# Altium PCB STM32f103c8_minsystem V2_1.PcbDoc
Units mm, origin at the board's own origin, x right, y up, seen from the top; angles counter-clockwise.
Board outline 18 x 35 mm, 2 copper layers (Top Layer, Bottom Layer); 27 components, 47 nets, 152 pads, 125 vias.
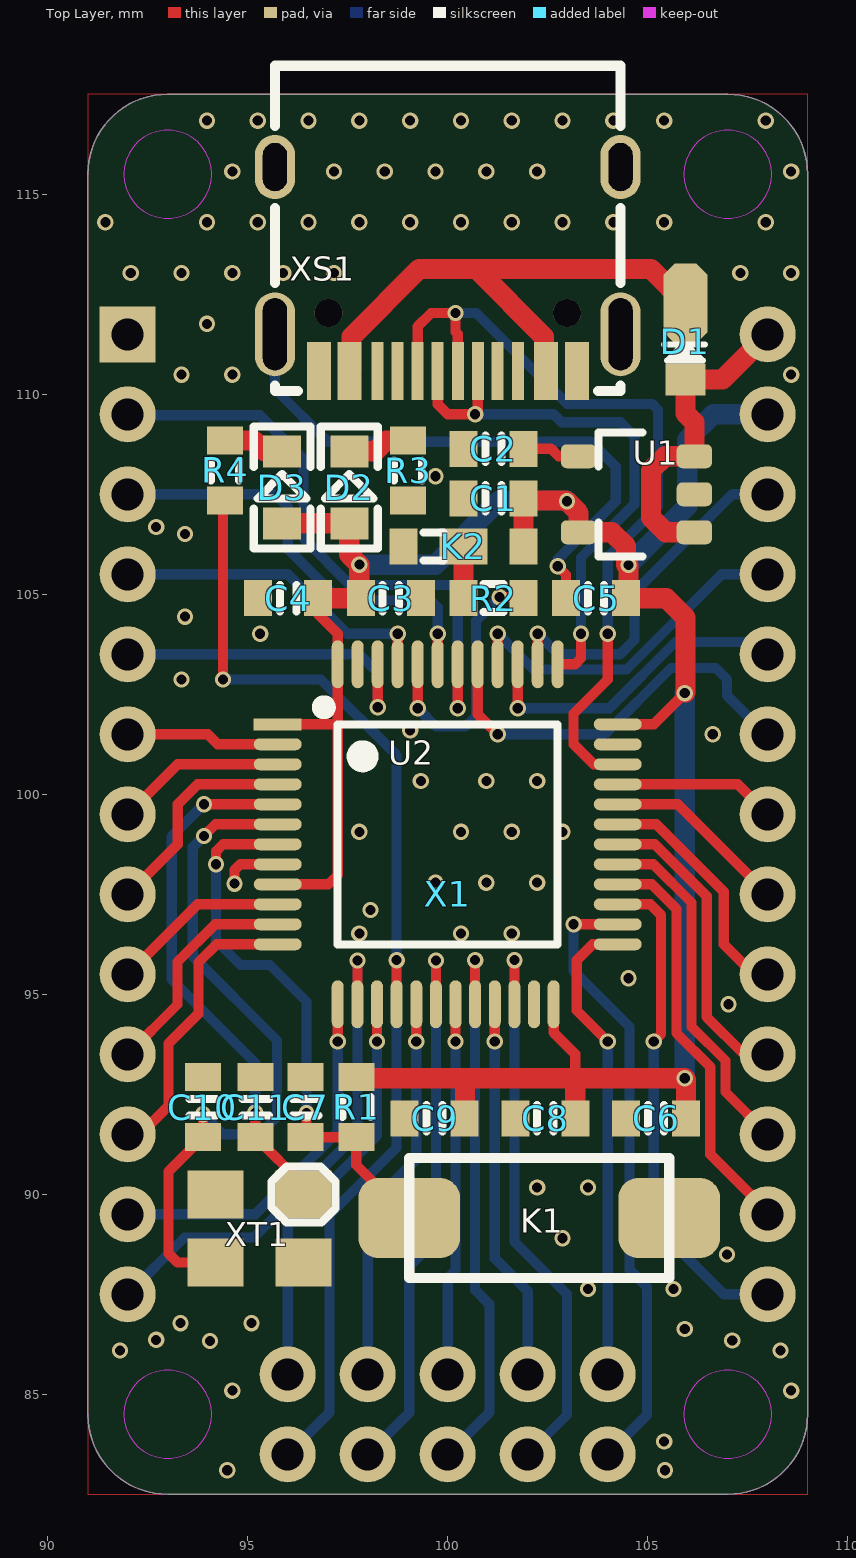
[diagram p0: Top Layer view]
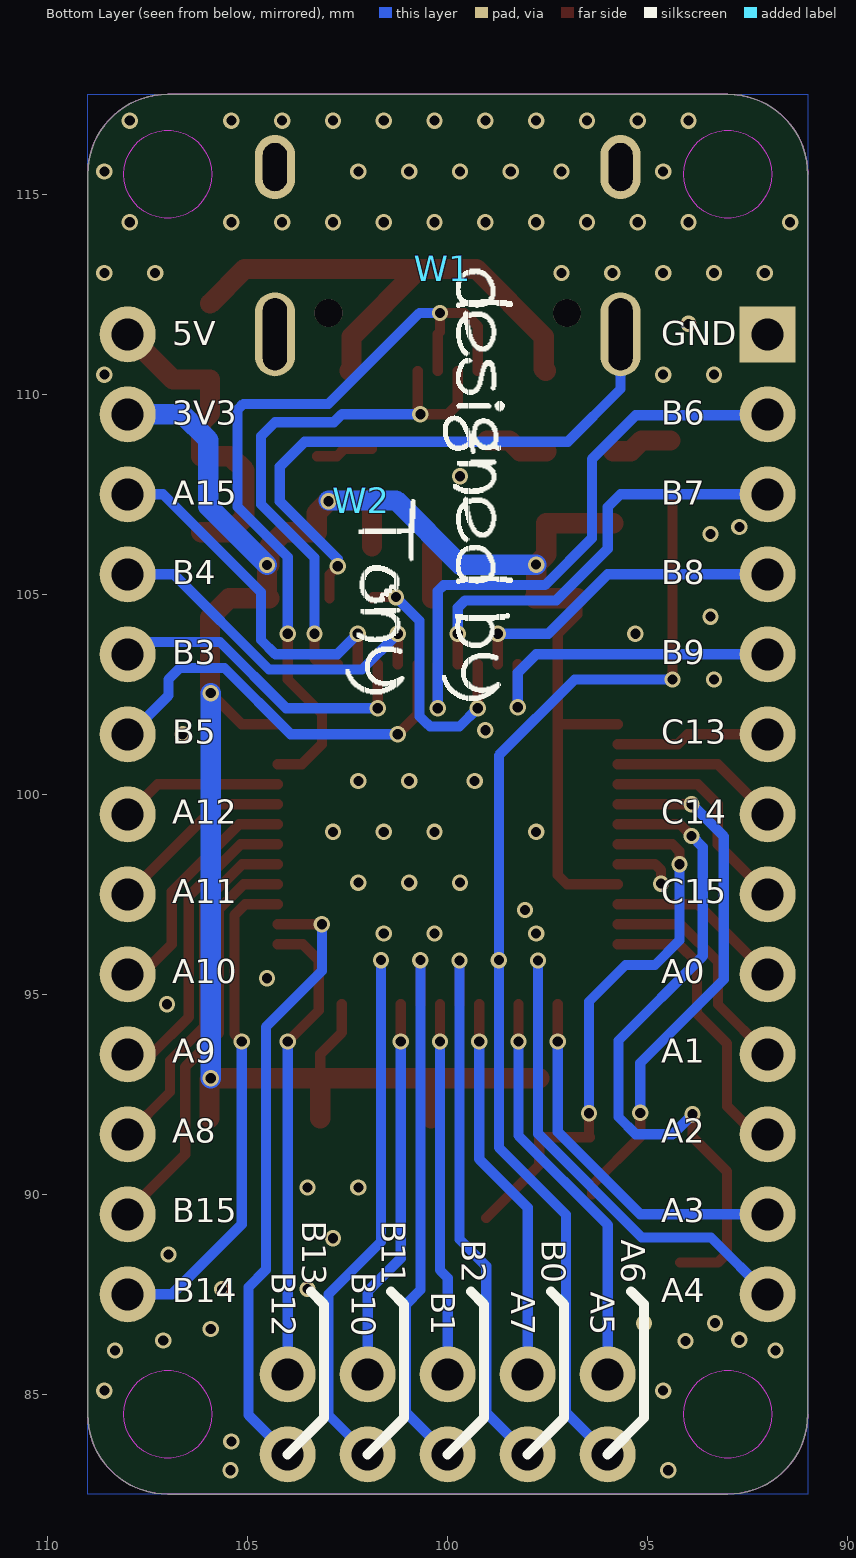
[diagram p1: Bottom Layer view, seen from below]

## Layer stack, top to bottom
Top Solder: solder mask 0.0102, Solder Resist, Dk 3.5
Top Layer: signal copper 0.0356
Dielectric 1: dielectric 0.32, FR-4, Dk 4.8
Bottom Layer: signal copper 0.0356
Bottom Solder: solder mask 0.0102, Solder Resist, Dk 3.5

## Board outline
91,84.5 91,115.5 cw(c93,115.5) 93,117.5 107,117.5 cw(c107,115.5) 109,115.5 109,84.5 cw(c107,84.5) 107,82.5 93,82.5 cw(c93,84.5)

## Design rules (kind name [scope] priority, off if disabled: settings)
AssemblyTestPointUsage [All] p0: scope1count=1 scope1_0_kind=Board scope1_0_value=Board scope2count=1 scope2_0_kind=Board scope2_0_value=Board commentlength=0
AssemblyTestpoint [All] p0: scope1count=1 scope1_0_kind=Board scope1_0_value=Board scope2count=1 scope2_0_kind=Board scope2_0_value=Board commentlength=0
Clearance [All] p0: scope1count=1 scope1_0_kind=Board scope1_0_value=Board scope2count=1 scope2_0_kind=Board scope2_0_value=Board commentlength=0 gap=0.127
Clearance [All] p1: gap=0.127 ignorepadtopadclearanceinfootprint=TRUE
ComponentClearance [All] p0 off: scope1count=1 scope1_0_kind=Board scope1_0_value=Board scope2count=1 scope2_0_kind=Board scope2_0_value=Board commentlength=0 gap=0 collisioncheckmode=3
ComponentClearance [All] p1 off: gap=0 collisioncheckmode=3 verticalgap=0.254 showdistances=FALSE
DiffPairsRouting [All] p0: scope1count=1 scope1_0_kind=Board scope1_0_value=Board scope2count=1 scope2_0_kind=Board scope2_0_value=Board commentlength=0
FabricationTestPointUsage [All] p0: scope1count=1 scope1_0_kind=Board scope1_0_value=Board scope2count=1 scope2_0_kind=Board scope2_0_value=Board commentlength=0 valid=0 allowmultiple=FALSE
FabricationTestpoint [All] p0: scope1count=1 scope1_0_kind=Board scope1_0_value=Board scope2count=1 scope2_0_kind=Board scope2_0_value=Board commentlength=0 side=3 testpointundercomponent=TRUE minsize=1.016 maxsize=2.54 preferedsize=1.524 minholesize=0 maxholesize=1.016 preferedholesize=0.813 testpointgrid=0.025
FanoutControl Fanout_BGA [All] p0 off: scope1count=1 scope1_0_kind=Board scope1_0_value=Board scope2count=1 scope2_0_kind=Board scope2_0_value=Board commentlength=69 // Protel DXP Scope 1 Expression Was: IsBGA   Fanout_BGA (Default Rule)
FanoutControl Fanout_LCC [All] p0 off: scope1count=1 scope1_0_kind=Board scope1_0_value=Board scope2count=1 scope2_0_kind=Board scope2_0_value=Board commentlength=69 // Protel DXP Scope 1 Expression Was: IsLCC   Fanout_LCC (Default Rule)
FanoutControl Fanout_SOIC [All] p0 off: scope1count=1 scope1_0_kind=Board scope1_0_value=Board scope2count=1 scope2_0_kind=Board scope2_0_value=Board commentlength=71 // Protel DXP Scope 1 Expression Was: IsSOIC   Fanout_SOIC (Default Rule)
FanoutControl Fanout_Small [All] p0 off: scope1count=1 scope1_0_kind=Board scope1_0_value=Board scope2count=1 scope2_0_kind=Board scope2_0_value=Board commentlength=84 // Protel DXP Scope 1 Expression Was: (CompPinCount < 5)   Fanout_Small (Default Rule)
FanoutControl Fanout_Default [All] p0: scope1count=1 scope1_0_kind=Board scope1_0_value=Board scope2count=1 scope2_0_kind=Board scope2_0_value=Board commentlength=30 // Fanout_Default (Default Rule)
Height [All] p0: scope1count=1 scope1_0_kind=Board scope1_0_value=Board scope2count=1 scope2_0_kind=Board scope2_0_value=Board commentlength=0
HoleSize [All] p0: scope1count=1 scope1_0_kind=Board scope1_0_value=Board scope2count=1 scope2_0_kind=Board scope2_0_value=Board commentlength=0 absolutevalues=TRUE maxlimit=2.54 minlimit=0.025 maxpercent=80.000 minpercent=20.000
HoleToHoleClearance [All] p0: scope1count=1 scope1_0_kind=Board scope1_0_value=Board scope2count=1 scope2_0_kind=Board scope2_0_value=Board commentlength=0
LayerPairs [All] p0: scope1count=1 scope1_0_kind=Board scope1_0_value=Board scope2count=1 scope2_0_kind=Board scope2_0_value=Board commentlength=0 enforce=TRUE
MinimumSolderMaskSliver [All] p0: scope1count=1 scope1_0_kind=Board scope1_0_value=Board scope2count=1 scope2_0_kind=Board scope2_0_value=Board commentlength=0
NetAntennae [All] p0: scope1count=1 scope1_0_kind=Board scope1_0_value=Board scope2count=1 scope2_0_kind=Board scope2_0_value=Board commentlength=0
PasteMaskExpansion [All] p0: scope1count=1 scope1_0_kind=Board scope1_0_value=Board scope2count=1 scope2_0_kind=Board scope2_0_value=Board commentlength=0 expansion=0
PlaneClearance [All] p0: scope1count=1 scope1_0_kind=Board scope1_0_value=Board scope2count=1 scope2_0_kind=Board scope2_0_value=Board commentlength=0 clearance=0.508
PlaneConnect [All] p0: scope1count=1 scope1_0_kind=Board scope1_0_value=Board scope2count=1 scope2_0_kind=Board scope2_0_value=Board commentlength=0 planeconnectstyle=Direct reliefexpansion=0.508 reliefentries=4 reliefconductorwidth=0.254 reliefairgap=0.254
PlaneConnect [All] p1: planeconnectstyle=Direct reliefexpansion=0.508 reliefentries=4 reliefconductorwidth=0.254 reliefairgap=0.254
PolygonConnect PolygonConnect_3 [All] p0 off: scope1count=1 scope1_0_kind=Board scope1_0_value=Board scope2count=1 scope2_0_kind=Board scope2_0_value=Board commentlength=69 connectstyle=Direct reliefconductorwidth=0.254 reliefentries=4 polygonreliefangle="90 Angle" // Protel DXP Scope 2 Expression Was: IsNamedPolygon('GND_L01_P001')
PolygonConnect PolygonConnect_2 [All] p0 off: scope1count=1 scope1_0_kind=Board scope1_0_value=Board scope2count=1 scope2_0_kind=Board scope2_0_value=Board commentlength=69 connectstyle=Direct reliefconductorwidth=0.254 reliefentries=4 polygonreliefangle="90 Angle" // Protel DXP Scope 2 Expression Was: IsNamedPolygon('GND_L02_P000')
PolygonConnect [All] p0 off: scope1count=1 scope1_0_kind=Board scope1_0_value=Board scope2count=1 scope2_0_kind=Board scope2_0_value=Board commentlength=73 connectstyle=Direct reliefconductorwidth=0.508 reliefentries=4 polygonreliefangle="90 Angle" // Protel DXP Scope 2 Expression Was: IsNamedPolygon('Bottom Layer-GND')
PolygonConnect PolygonConnect_1 [All] p0 off: scope1count=1 scope1_0_kind=Board scope1_0_value=Board scope2count=1 scope2_0_kind=Board scope2_0_value=Board commentlength=70 connectstyle=Direct reliefconductorwidth=0.508 reliefentries=4 polygonreliefangle="90 Angle" // Protel DXP Scope 2 Expression Was: IsNamedPolygon('Top Layer-GND')
PolygonConnect PolygonConnect_3 [All vs IsNamedPolygon('GND_L01_P001')] p1: connectstyle=Direct reliefconductorwidth=0.254 reliefentries=4 polygonreliefangle="90 Angle" airgapwidth=0.254
PolygonConnect PolygonConnect_2 [All vs IsNamedPolygon('GND_L02_P000')] p2: connectstyle=Direct reliefconductorwidth=0.254 reliefentries=4 polygonreliefangle="90 Angle" airgapwidth=0.254
PolygonConnect [All vs IsNamedPolygon('Bottom Layer-GND')] p3: connectstyle=Direct reliefconductorwidth=0.508 reliefentries=4 polygonreliefangle="90 Angle" airgapwidth=0.254
PolygonConnect PolygonConnect_1 [All vs IsNamedPolygon('Top Layer-GND')] p4: connectstyle=Direct reliefconductorwidth=0.508 reliefentries=4 polygonreliefangle="90 Angle" airgapwidth=0.254
RoutingCorners [All] p0: scope1count=1 scope1_0_kind=Board scope1_0_value=Board scope2count=1 scope2_0_kind=Board scope2_0_value=Board commentlength=0 cornerstyle=45-Degree minsetback=2.54 maxsetback=2.54
RoutingLayers [All] p0: scope1count=1 scope1_0_kind=Board scope1_0_value=Board scope2count=1 scope2_0_kind=Board scope2_0_value=Board commentlength=0 top layer=Automatic bottom layer=Automatic
RoutingPriority [All] p0: scope1count=1 scope1_0_kind=Board scope1_0_value=Board scope2count=1 scope2_0_kind=Board scope2_0_value=Board commentlength=0
RoutingTopology [All] p0: scope1count=1 scope1_0_kind=Board scope1_0_value=Board scope2count=1 scope2_0_kind=Board scope2_0_value=Board commentlength=0 topology=Shortest
RoutingVias [All] p0: scope1count=1 scope1_0_kind=Board scope1_0_value=Board scope2count=1 scope2_0_kind=Board scope2_0_value=Board commentlength=0 holewidth=0.254 width=0.406 viastyle="Through Hole" minholewidth=0.254 minwidth=0.406 maxholewidth=0.711 maxwidth=1.27
RoutingVias [All] p1: holewidth=0.254 width=0.406 viastyle="Through Hole" minholewidth=0.254 minwidth=0.406 maxholewidth=0.711 maxwidth=1.27
ShortCircuit [All] p0: scope1count=1 scope1_0_kind=Board scope1_0_value=Board scope2count=1 scope2_0_kind=Board scope2_0_value=Board commentlength=0 allowed=FALSE
SilkToBoardRegionClearance [All] p0: scope1count=1 scope1_0_kind=Board scope1_0_value=Board scope2count=1 scope2_0_kind=Board scope2_0_value=Board commentlength=0
SilkToSilkClearance [All] p0: scope1count=1 scope1_0_kind=Board scope1_0_value=Board scope2count=1 scope2_0_kind=Board scope2_0_value=Board commentlength=0
SilkToSolderMaskClearance [All] p0 off: scope1count=1 scope1_0_kind=Board scope1_0_value=Board scope2count=1 scope2_0_kind=Board scope2_0_value=Board commentlength=44 // Protel DXP Scope 1 Expression Was: IsPad
SolderMaskExpansion [All] p0: scope1count=1 scope1_0_kind=Board scope1_0_value=Board scope2count=1 scope2_0_kind=Board scope2_0_value=Board commentlength=0 expansion=0.102
SolderMaskExpansion [All] p1: expansion=0.102 istentingtop=FALSE
UnRoutedNet [All] p0: scope1count=1 scope1_0_kind=Board scope1_0_value=Board scope2count=1 scope2_0_kind=Board scope2_0_value=Board commentlength=0
UnpouredPolygon [All] p0: scope1count=1 scope1_0_kind=Board scope1_0_value=Board scope2count=1 scope2_0_kind=Board scope2_0_value=Board commentlength=0
Width [All] p0: scope1count=1 scope1_0_kind=Board scope1_0_value=Board scope2count=1 scope2_0_kind=Board scope2_0_value=Board commentlength=0 maxlimit=2.54 minlimit=0.254 preferedwidth=0.254
Width [All] p1: maxlimit=2.54 minlimit=0.254 preferedwidth=0.254
28 further rules are at their usual default settings.

## Components (designator, comment, footprint, x,y, rotation, side; value= is the part's Value field where it differs from the comment)
C1 "" CAP_0603 101.143,107.779 r0 top locked
C2 "106" CAP_0603 101.143,109.017 r0 top locked
C3 "104" CAP_0603 98.577,104.521 r180 top locked
C4 "104" CAP_0603 96.012,104.521 r180 top locked
C5 "104" CAP_0603 103.708,105.283 r0 top locked
C6 "104" CAP_0603 105.207,92.278 r0 top locked
C7 "104" CAP_0603 96.063,92.177 r90 top locked
C8 "104" CAP_0603 102.438,92.278 r0 top locked
C9 "105" CAP_0603 99.67,92.278 r0 top locked
C10 "22p" CAP_0603 93.497,92.177 r90 top locked
C11 "22p" CAP_0603 94.818,92.177 r90 top locked
D1 "ss14" SOD-323 105.943,110.368 r90 top locked
D2 "led" led0603 97.663,107.721 r90 top locked
D3 "led" led0603 95.987,107.721 r90 top locked
K1 "3-6微动开关" 3-6微动开关 105.537,89.408 r180 top locked
K2 "Boot0选择-默认GND" "Switch 1-2 0603" 98.893,106.197 r0 top locked
R1 "10k" RES_0603 98.095,92.177 r270 top locked
R2 "10k" RES_0603 101.143,105.283 r0 top locked
R3 "3k" RES_0603 99.39,108.095 r270 top locked
R4 "3k" RES_0603 94.818,108.095 r270 top locked
U1 "ME6211 3V3" SOT23-5 104.667,107.5 r180 top locked
U2 "STM32F103C8T6" LQFP48 100,99 r0 top locked
W1 "设计于" "designed by（430-70）" 100.129,113.132 r270 bottom
W2 "Tony" Tony_2(200-70) 102.158,107.345 r270 bottom
X1 "STM32F103C8T6模块接口 V2.1" "STM32F103C8T6 V2_1引脚" 90,111.5 r0 top locked
XS1 "Type-C" TypeC-304-16BCP 95.68,111.5 r180 top locked
XT1 "8M" SMD3225_4p 96.393,89.99 r180 top locked

## Footprints (in the part's own frame and the unit in brackets; to place one, negate y for a bottom-side part, rotate by r counter-clockwise, add the part's x,y. Pads: shape width x height; smd on the part's side, far side on the other; paste and mask are expansions set on the pad)
3-6微动开关 [mm]
  rrect50% 2.54x2 smd: 1(0,0) 2(6.5,0)
  silkscreen extent 0,-1.5 6.5,1.5
CAP_0603 [mm]
  rect 0.7x0.9 smd: 1(-0.75,-0.381) 2(0.75,-0.381)
  silkscreen extent -0.2,-0.71 0.2,-0.05
"designed by（430-70）" [mm]
  silkscreen extent 0,0 10.79,1.75
led0603 [mm]
  rect 0.8x0.95 smd: 1(-0.95,0.125) 2(0.85,0.125)
  silkscreen extent -1.57,-0.59 1.47,0.84
LQFP48 [mm] "STM32-48pin"
  rect 1.2x0.3 smd mask+0: 1(-4.25,2.75)
  oval 1.2x0.3 smd mask+0: 2(-4.25,2.25) 3(-4.25,1.75) 4(-4.25,1.25) 5(-4.25,0.75) 6(-4.25,0.25) 7(-4.25,-0.25) 8(-4.25,-0.75) 9(-4.25,-1.25) 10(-4.25,-1.75) 11(-4.25,-2.25) 12(-4.25,-2.75) 25(4.25,-2.75) 26(4.25,-2.25) 27(4.25,-1.75) 28(4.25,-1.25) 29(4.25,-0.75) 30(4.25,-0.25) 31(4.25,0.25) 32(4.25,0.75) 33(4.25,1.25) 34(4.25,1.75) 35(4.25,2.25) 36(4.25,2.75)
  oval 0.3x1.2 smd mask+0: 13(-2.75,-4.25) 14(-2.259,-4.25) 15(-1.768,-4.25) 16(-1.278,-4.25) 17(-0.787,-4.25) 18(-0.296,-4.25) 19(0.195,-4.25) 20(0.685,-4.25) 21(1.176,-4.25) 22(1.667,-4.25) 23(2.158,-4.25) 24(2.648,-4.25) 37(2.75,4.25) 38(2.25,4.25) 39(1.75,4.25) 40(1.25,4.25) 41(0.75,4.25) 42(0.25,4.25) 43(-0.25,4.25) 44(-0.75,4.25) 45(-1.25,4.25) 46(-1.75,4.25) 47(-2.25,4.25) 48(-2.75,4.25)
  silkscreen extent -3.25,-2.75 2.75,3.32
RES_0603 [mm]
  rect 0.7x0.9 smd: 1(-0.75,-0.381) 2(0.75,-0.381)
  silkscreen extent -0.25,-0.73 0.25,-0.03
SMD3225_4p [mm]
  rect 1.4x1.2 smd: 1(0,0) 2(2.2,0) 3(2.2,1.7) 4(0,1.7)
  silkscreen extent -0.8,-0.7 0.8,0.7
SOD-323 [mm] "1.8x1.3X0.9mm（长宽高，不包括引脚）"
  oct 2x1.1 smd: 1(1.9,0)
  rect 0.8x1 smd: 2(0,0)
  silkscreen extent 0.47,-0.48 0.88,0.53
SOT23-5 [mm] "SOT23, 3-Leads, Body 3.1x3.0mm (max), Pitch 0.95mm, IPC Medium Density"
  rrect50% 0.889x0.6 smd: 1(-1.5,0.95) 2(-1.5,0) 3(-1.5,-0.95) 4(1.396,-0.95) 5(1.396,0.95)
  silkscreen extent -0.2,-1.55 0.9,1.55
"STM32F103C8T6 V2_1引脚" [mm] "排针朝下"
  rect 1.4x1.4 hole 0.8: 1(2,0)
  round 1.4 hole 0.8: 2(2,-2) 3(2,-4) 4(2,-6) 5(2,-8) 6(2,-10) 7(2,-12) 8(2,-14) 9(2,-16) 10(2,-18) 11(2,-20) 12(2,-22) 13(2,-24) 14(6,-26) 15(6,-28) 16(8,-26) 17(8,-28) 18(10,-26) 19(10,-28) 20(12,-26) 21(12,-28) 22(14,-26) 23(14,-28) 24(18,-24) 25(18,-22) 26(18,-20) 27(18,-18) 28(18,-16) 29(18,-14) 30(18,-12) 31(18,-10) 32(18,-8) 33(18,-6) 34(18,-4) 35(18,-2) 36(18,0)
"Switch 1-2 0603" [mm] "单刀双掷0603贴片选择开关"
  rect 0.7x0.9 smd: 1(0,0) 3(3,0)
  rect 1.2x0.9 smd: 2(1.5,0)
  silkscreen extent 0.5,-0.35 1,0.35
Tony_2(200-70) [mm]
  silkscreen extent -0.03,-0.38 4.85,1.35
TypeC-304-16BCP [mm]
  oval 1x2.1 hole 0.6 slot 1.8 at 90 deg: 13(-8.64,0) 14(0,0)
  oval 1x1.6 hole 0.6 slot 1.2 at 90 deg: 15(-8.64,-4.18) 16(0,-4.18)
  rect 0.6x1.45 smd: A1B12(-7.545,0.915) A4B9(-6.77,0.915) B1A12(-1.1,0.915) B4A9(-1.87,0.915)
  rect 0.3x1.45 smd: A5(-5.57,0.914) A6(-4.57,0.915) A7(-4.07,0.915) A8(-3.07,0.915) B5(-2.57,0.915) B6(-3.57,0.915) B7(-5.07,0.915) B8(-6.07,0.915)
  round 0.7 hole 0.7 unplated: ""(-7.3,-0.53) ""(-1.34,-0.53)
  silkscreen extent -8.64,-6.71 0,1.42

## Part data
C1 C2 C3 C4 C5 C6 C7 C8 C9 C10 C11: library part cap
D1: library part Diode
K1: "3*6mm"
K2: library part "Switch 1-2", "单刀双掷1-2"
R1 R2 R3 R4: library part Res
U1: library part ME6211, "LDO"
U2: library part STM32F103C8T6-LCC
XS1: library part Type-C母口
XT1: library part XTAL-4P

## Via types
v1: diameter 0.406, hole 0.254, Top Layer to Bottom Layer, 65 vias
v2: diameter 0.406, hole 0.254, Top Layer to Bottom Layer, tented both sides, 60 vias

## Nets (pads, with @x,y where several pads share a name; then routed paths per layer and width w, separated by ;. In a path a pad name is that pad's centre, name@x,y a point inside that pad or via, vN(x,y) a via of type N, cw(c..) or ccw(c..) an arc to the next point about the centre after c; other vN are vias at no path point)
3v3: C1.2 C3.2 C4.1 C5.2 C6.2 C8.2 C9.2 D2.1 D3.1 K2.3 R1.1 U1.5 U2.1 U2.9 U2.24 U2.36 U2.48 X1.35 | length 61.2
  Top Layer w0.254: U2.9 97.02,97.75 97.25,97.98 97.25,101.75 ; U2.1 97.25,101.75 ; C4.1 96.762,104.501 97.25,104.013 U2.48 97.25,101.75 ; U2.24 102.648,94.04 103.188,93.5 103.188,92.901 103.188,92.864 ; U2.36 105.148,101.75 v2(105.926,102.527) v2@105.943,102.545
  Top Layer w0.508: D3.1 D2.1 97.538,105.993 v2(97.79,105.74) 97.79,104.939 C3.2 C4.1 ; R1.1@97.714,92.901 100.432,92.901 ; C9.2 100.432,91.909 100.432,92.901 ; K2.3 C1.2 101.946,107.345 102.958,107.345 103.271,107.032 U1.5 104.106,106.55 104.458,106.197 v2@104.458,105.74 ; C8.2 103.188,92.864 ; v2(104.517,105.731) 104.517,104.961 C5.2 105.461,104.902 105.943,104.419 v2@105.943,102.545 ; C6.2 105.957,92.87 v2(105.926,92.901) 103.188,92.901 100.432,92.901
  Bottom Layer w0.508: v2(97.79,105.74) 99.688,105.74 101.293,107.345 v2@102.98,107.345 ; v2(104.517,105.731) 105.99,107.203 105.99,108.857 106.633,109.5 X1.35 ; v2(105.926,92.901) v2(105.926,102.527)
  other v2: 102.98,107.323
BOOT0: R2.2 U2.44 | length 6.7
  Top Layer w0.254: v2(99.25,102.151) U2.44 ; v2(101.295,104.927) 101.867,104.927 R2.2
  Bottom Layer w0.254: v2(99.25,102.151) 99.707,101.694 100.439,101.694 100.498,101.752 100.508,101.752 100.707,101.952 100.707,104.339 v2(101.295,104.927)
GND: C1.1 C2.1 C3.1 C4.2 C5.1 C6.1 C7.2 C8.1 C9.1 C10.2 C11.2 K1.1 K2.1 R3.2 U1.2 U2.8 U2.23 U2.35 U2.47 X1.1 XS1.13 XS1.14 XS1.15 XS1.16 XS1.A1B12 XS1.B1A12 XT1.2 XT1.4 | length 16.1
  Top Layer w0.254: v2(94.666,97.765) 94.666,98.101 94.815,98.25 U2.8 ; v2(102.75,105.7) 102.958,105.492 C5.1
  Bottom Layer w0.254: XS1.14 95.68,110.132 96.999,108.814 103.574,108.814 104.199,108.188 104.199,107.323 102.75,105.874 v2(102.75,105.7)
  other v1: 105.41,83.82 94.615,85.09 108.585,85.09 92.71,86.36 103.505,87.63 102.87,88.9 102.235,90.17 103.505,90.17 97.79,96.52 100.33,96.52 101.6,96.52 99.695,97.79 100.965,97.79 102.235,97.79 97.79,99.06 100.33,99.06 101.6,99.06 102.87,99.06 100.965,100.33 102.235,100.33 99.06,101.6 93.345,102.87 92.71,106.68 99.695,107.95 93.345,110.49 94.615,110.49 108.585,110.49 93.98,111.76 92.075,113.03 93.345,113.03 94.615,113.03 95.885,113.03 97.155,113.03 107.315,113.03 108.585,113.03 91.44,114.3 93.98,114.3 95.25,114.3 96.52,114.3 97.79,114.3 99.06,114.3 100.33,114.3 101.6,114.3 102.87,114.3 104.14,114.3 105.41,114.3 107.95,114.3 94.615,115.57 97.155,115.57 98.425,115.57 99.695,115.57 100.965,115.57 102.235,115.57 108.585,115.57 93.98,116.84 95.25,116.84 96.52,116.84 97.79,116.84 99.06,116.84 100.33,116.84 101.6,116.84 102.87,116.84 104.14,116.84 105.41,116.84 107.95,116.84
  other v2: 94.489,83.1 105.43,83.1 91.806,86.096 108.319,86.096 94.058,86.334 107.112,86.346 105.926,86.628 93.321,86.778 95.095,86.778 105.643,87.63 106.984,88.494 107.017,94.75 104.517,95.4 98.071,97.108 99.327,100.334 106.627,101.5 95.31,104.013 93.433,104.44 93.433,106.506
NetC2_2: C2.2 U1.4 | length 1.5
  Top Layer w0.254: C2.2 102.584,108.636 102.77,108.45 U1.4
NetC10_1: C10.1 U2.6 XT1.3 | length 17.3
  Top Layer w0.254: v2(93.878,91.999) C10.1 93.016,90.564 93.016,88.524 93.25,88.29 XT1.3 ; v2(93.904,98.958) 94.195,99.25 U2.6
  Bottom Layer w0.254: v2(93.878,91.999) 94.377,91.5 95.301,91.5 95.733,91.932 95.733,93.844 93.624,95.952 93.624,98.679 v2(93.904,98.958)
NetC11_1: C11.1 U2.5 XT1.1 | length 13.3
  Top Layer w0.254: v2(93.904,99.75) U2.5 ; v2(95.189,92.035) 95.189,91.437 96.393,90.233 XT1.1
  Bottom Layer w0.254: v2(93.904,99.75) 93.1,98.946 93.1,95.368 95.189,93.279 v2(95.189,92.035)
NetD1_1: D1.1 XS1.A4B9 XS1.B4A9 | length 13.5
  Top Layer w0.508: XS1.B4A9 97.596,110.631 97.596,111.437 99.29,113.132 100.708,113.132 ; XS1.A4B9 102.404,110.631 102.404,111.436 100.708,113.132 ; D1.1 105.08,113.132 100.708,113.132
NetD2_2: D2.2 R3.1 | length 1.6
  Top Layer w0.508: D2.2 98.185,108.571 98.459,108.845 R3.1
NetD3_2: D3.2 R4.1 | length 1.5
  Top Layer w0.508: R4.1 95.15,108.845 95.424,108.571 D3.2
NetK2_2: K2.2 R2.1 | length 1.3
  Top Layer w0.508: R2.1 K2.2
NRST: C7.1 K1.2 R1.2 U2.7 | length 14
  Top Layer w0.254: v2(94.209,98.25) 94.209,98.578 94.381,98.75 U2.7 ; v2(96.469,92.024) 96.469,91.452 C7.1 R1.2 97.714,90.731 K1.2
  Bottom Layer w0.254: v2(94.209,98.25) 94.209,96.342 94.818,95.733 95.555,95.733 96.469,94.818 v2(96.469,92.024)
PA0: U2.10 X1.9 | length 4.5
  Top Layer w0.254: X1.9 93.75,97.25 U2.10
PA1: U2.11 X1.10 | length 5.7
  Top Layer w0.254: X1.10 93.243,94.743 93.243,95.809 94.185,96.75 U2.11
PA2: U2.12 X1.11 | length 7.4
  Top Layer w0.254: X1.11 92.314,91.5 93.016,92.202 93.016,93.761 93.766,94.511 93.766,95.793 94.223,96.25 U2.12
PA3: U2.13 X1.12 | length 9.3
  Top Layer w0.254: v2(97.25,93.821) U2.13
  Bottom Layer w0.254: X1.12 95.189,89.5 97.25,91.561 v2(97.25,93.821)
PA4: U2.14 X1.13 | length 12.8
  Top Layer w0.254: U2.14 v2(97.741,95.843)
  Bottom Layer w0.254: X1.13 93.42,88.92 95.148,88.92 97.741,91.513 v2(97.741,95.843)
PA5: U2.15 X1.14 | length 10.2
  Top Layer w0.254: v2(98.232,93.821) U2.15
  Bottom Layer w0.254: X1.14 96,89.234 98.232,91.465 v2(98.232,93.821)
PA6: R4.2 U2.16 X1.15 | length 29.3
  Top Layer w0.254: v2(94.381,102.87) 94.381,107.289 R4.2 ; U2.16 v2(98.722,95.852)
  Bottom Layer w0.254: v2(94.381,102.87) 96.825,102.87 98.722,100.973 v2(98.722,95.852) 98.722,91.17 97.046,89.493 97.046,84.546 X1.15
PA7: U2.17 X1.16 | length 9.8
  Top Layer w0.254: v2(99.213,93.821) U2.17
  Bottom Layer w0.254: X1.16 98,89.665 99.213,90.878 v2(99.213,93.821)
PA8: U2.29 X1.26 | length 8.8
  Top Layer w0.254: U2.29 105.139,98.25 106.096,97.293 106.096,94.189 106.942,93.343 106.942,92.558 X1.26
PA9: U2.30 X1.27 | length 7.7
  Top Layer w0.254: U2.30 105.177,98.75 106.477,97.451 106.477,94.428 107.405,93.5 X1.27
PA10: U2.31 X1.28 | length 6.1
  Top Layer w0.254: U2.31 105.216,99.25 106.9,97.566 106.9,96.25 107.65,95.5 X1.28
PA11: U2.32 X1.29 | length 4.7
  Top Layer w0.254: U2.32 105.75,99.75 X1.29
PA12: U2.33 X1.30 | length 4.1
  Top Layer w0.254: U2.33 107.25,100.25 X1.30
PA15: U2.38 X1.34 | length 9.1
  Top Layer w0.254: U2.38 v2(102.25,104.013)
  Bottom Layer w0.254: v2(102.25,104.013) 102.763,103.5 104.309,103.5 104.667,103.857 104.667,105.05 107.117,107.5 X1.34
PB0: U2.18 X1.17 | length 14.1
  Top Layer w0.254: U2.18 v2(99.704,95.843)
  Bottom Layer w0.254: X1.17 99.037,84.537 99.037,88.204 99.704,88.871 v2(99.704,95.843)
PB1: U2.19 X1.18 | length 9.3
  Top Layer w0.254: v2(100.195,93.821) U2.19
  Bottom Layer w0.254: X1.18 100,87.908 100.195,88.103 v2(100.195,93.821)
PB2: U2.20 X1.19 | length 14
  Top Layer w0.254: U2.20 v2(100.685,95.852)
  Bottom Layer w0.254: X1.19 101.041,84.541 101.041,87.249 100.685,87.605 v2(100.685,95.852)
PB3: U2.39 X1.32 | length 8.2
  Top Layer w0.254: v2(101.75,102.151) U2.39
  Bottom Layer w0.254: v2(101.75,102.151) 104.038,102.151 105.693,103.806 107.694,103.806 X1.32
PB4: U2.40 X1.33 | length 8.9
  Top Layer w0.254: U2.40 v2(101.25,104.013)
  Bottom Layer w0.254: v2(101.25,104.013) 102.144,103.119 104.467,103.119 106.848,105.5 X1.33
PB5: U2.41 X1.31 | length 10.3
  Top Layer w0.254: U2.41 100.75,102 v2(101.25,101.5)
  Bottom Layer w0.254: v2(101.25,101.5) 103.926,101.5 105.582,103.156 106.698,103.156 106.984,102.87 106.984,102.466 107.95,101.5 X1.31
PB6: U2.42 X1.2 | length 15.3
  Top Layer w0.254: v2(100.25,102.151) U2.42
  Bottom Layer w0.254: X1.2 92.026,109.474 95.301,109.474 96.396,108.379 96.396,106.399 97.567,105.228 100.101,105.228 100.25,105.079 v2(100.25,102.151)
PB7: U2.43 X1.3 | length 10.9
  Top Layer w0.254: U2.43 v2(99.75,104.013)
  Bottom Layer w0.254: X1.3 95.68,107.5 96,107.18 96,106.136 97.289,104.847 99.566,104.847 99.75,104.663 v2(99.75,104.013)
PB8: U2.45 X1.4 | length 8.1
  Top Layer w0.254: U2.45 v2(98.75,104.013)
  Bottom Layer w0.254: X1.4 96,105.5 97.487,104.013 v2(98.75,104.013)
PB9: U2.46 X1.5 | length 8.4
  Top Layer w0.254: v2(98.25,102.176) U2.46
  Bottom Layer w0.254: X1.5 97.79,103.5 98.25,103.04 v2(98.25,102.176)
PB10: U2.21 X1.20 | length 9.6
  Top Layer w0.254: v2(101.176,93.821) U2.21
  Bottom Layer w0.254: v2(101.176,93.821) 101.176,88.399 102,87.575 X1.20
PB11: U2.22 X1.21 | length 14.4
  Top Layer w0.254: U2.22 v2(101.667,95.852)
  Bottom Layer w0.254: v2(101.667,95.852) 101.667,88.813 102.98,87.5 102.98,84.48 X1.21
PB12: U2.25 X1.22 | length 11.9
  Top Layer w0.254: v2(104,93.821) 103.225,94.596 103.225,95.852 103.623,96.25 U2.25
  Bottom Layer w0.254: X1.22 v2(104,93.821)
PB13: U2.26 X1.23 | length 15.5
  Top Layer w0.254: v2(103.148,96.75) U2.26
  Bottom Layer w0.254: v2(103.148,96.75) 103.148,95.582 104.546,94.183 104.546,88.113 104.978,87.681 104.978,84.478 X1.23
PB14: U2.27 X1.24 | length 12.6
  Top Layer w0.254: U2.27 105.061,97.25 105.334,96.977 105.334,94.005 v2(105.149,93.821) v2@105.105,93.777
  Bottom Layer w0.254: v2(105.149,93.821) 105.149,89.251 106.9,87.5 X1.24
PB15: U2.28 X1.25 | length 10.3
  Top Layer w0.254: U2.28 105.1,97.75 105.715,97.135 105.715,94.031 106.561,93.185 106.561,91 108,89.561 X1.25
PC13: U2.2 X1.6 | length 3.9
  Top Layer w0.254: X1.6 94,101.5 94.25,101.25 U2.2
PC14: U2.3 X1.7 | length 4.3
  Top Layer w0.254: X1.7 93.25,100.75 U2.3
PC15: U2.4 X1.8 | length 5.5
  Top Layer w0.254: X1.8 93.25,98.75 93.25,99.75 93.75,100.25 U2.4
SWCLK: U2.37 XS1.A7 XS1.B7 | length 13.9
  Top Layer w0.254: XS1.A7 99.75,109.75 100,109.5 v2(100.685,109.5) 100.75,109.565 XS1.B7 ; U2.37 103.185,103.25 103.333,103.399 v2(103.333,104.013)
  Bottom Layer w0.254: v2(100.685,109.5) 102.648,109.5 102.848,109.3 104.32,109.3 104.667,108.953 104.667,107.252 103.333,105.919 v2(103.333,104.013)
SWDIO: U2.34 XS1.A6 XS1.B6 | length 20.3
  Top Layer w0.254: XS1.B6 99.25,111.696 99.584,112.03 v2(100.195,112.03) 100.195,111.555 100.25,111.5 XS1.A6 ; v2(104,104.013) 104,102.87 103.148,102.018 103.148,101.25 103.648,100.75 U2.34
  Bottom Layer w0.254: v2(100.195,112.03) 100.71,112.03 102.98,109.76 105.109,109.76 105.257,109.612 105.257,107.189 104,105.932 v2(104,104.013)
VDD_5V: D1.2 U1.1 U1.3 X1.36 | length 8.2
  Top Layer w0.508: U1.1 105.453,106.55 105.08,106.923 105.08,108.095 105.435,108.45 U1.3 106.167,109.3 105.943,109.523 D1.2 106.868,110.368 X1.36
pads on no net: XS1. XS1.A5 XS1.A8 XS1.B5 XS1.B8

## Polygon pours and split planes (outlines as drawn)
GND on Bottom Layer "GND_L02_P000" (solid, remove dead copper, pour order 0): 91,82.5 109,82.5 109,117.5 91,117.5
GND on Top Layer "GND_L01_P001" (solid, remove dead copper, pour order 1): 91,82.5 109,82.5 109,117.5 91,117.5

## Keep-outs
Keep-Out Layer:
  circle w0.013: c93,115.5 r1.1
  circle w0.013: c107,115.5 r1.1
  circle w0.013: c107,84.5 r1.1
  circle w0.013: c93,84.5 r1.1
  lines w0.013: 91,84.5 ccw(c93,84.5) 93,82.5 107,82.5 ccw(c107,84.5) 109,84.5 109,115.5 ccw(c107,115.5) 107,117.5 93,117.5 ccw(c93,115.5) 91,115.5 91,84.5

## Silkscreen, mask and mechanical layers (free items; w line width, h text height)
Bottom Overlay:
  lines w0.254: 95.415,87.569 95.095,87.248 95.095,84.405 96.003,83.497 ; 97.417,87.567 97.096,87.247 97.096,84.404 98.005,83.495 ; 99.417,87.567 99.096,87.247 99.096,84.404 100.005,83.495 ; 101.417,87.567 101.096,87.247 101.096,84.404 102.005,83.495 ; 103.417,87.567 103.096,87.247 103.096,84.404 104.005,83.495
  text "GND" at 94.665,111.23 h0.6
  text "5V" at 106.886,111.23 h0.6
  text "B6" at 94.665,109.236 h0.6
  text "3V3" at 106.886,109.236 h0.6
  text "B7" at 94.665,107.242 h0.6
  text "A15" at 106.886,107.242 h0.6
  text "B8" at 94.665,105.248 h0.6
  text "B4" at 106.886,105.248 h0.6
  text "B9" at 94.665,103.255 h0.6
  text "B3" at 106.886,103.255 h0.6
  text "C13" at 94.665,101.261 h0.6
  text "B5" at 106.886,101.261 h0.6
  text "C14" at 94.665,99.267 h0.6
  text "A12" at 106.886,99.267 h0.6
  text "C15" at 94.665,97.273 h0.6
  text "A11" at 106.886,97.273 h0.6
  text "A0" at 94.665,95.279 h0.6
  text "A10" at 106.886,95.279 h0.6
  text "A1" at 94.665,93.285 h0.6
  text "A9" at 106.886,93.285 h0.6
  text "A2" at 94.665,91.291 h0.6
  text "A8" at 106.886,91.291 h0.6
  text "B11" at 101.644,89.342 h0.6 r90
  text "B13" at 103.638,89.342 h0.6 r90
  text "A3" at 94.665,89.297 h0.6
  text "B15" at 106.886,89.297 h0.6
  text "A6" at 95.662,88.864 h0.6 r90
  text "B0" at 97.656,88.864 h0.6 r90
  text "B2" at 99.65,88.864 h0.6 r90
  text "B10" at 102.406,88.047 h0.6 r90
  text "B12" at 104.4,88.047 h0.6 r90
  text "A5" at 96.424,87.569 h0.6 r90
  text "A7" at 98.418,87.569 h0.6 r90
  text "B1" at 100.412,87.569 h0.6 r90
  text "A4" at 94.665,87.303 h0.6
  text "B14" at 106.886,87.303 h0.6
Mechanical 1:
  circle w0.013: c93,115.5 r1.1
  circle w0.013: c107,115.5 r1.1
  circle w0.013: c107,84.5 r1.1
  circle w0.013: c93,84.5 r1.1
  lines w0.013: 91,84.5 ccw(c93,84.5) 93,82.5 107,82.5 ccw(c107,84.5) 109,84.5 109,115.5 ccw(c107,115.5) 107,117.5 93,117.5 ccw(c93,115.5) 91,115.5 91,84.5

## Text inside footprints (layer, text, board x,y; h text height)
U1: Mechanical 1 "106" at 101.294,104.977 h0.6